# Allegro board OSC_NOU.brd
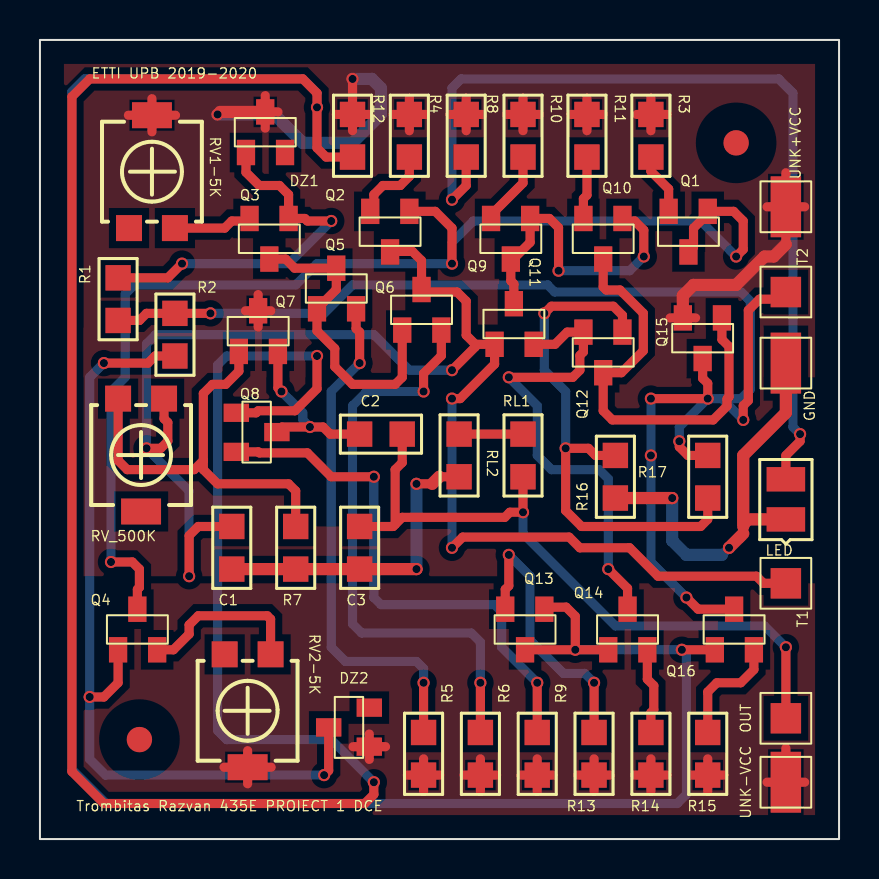
[diagram p0: board, top side]
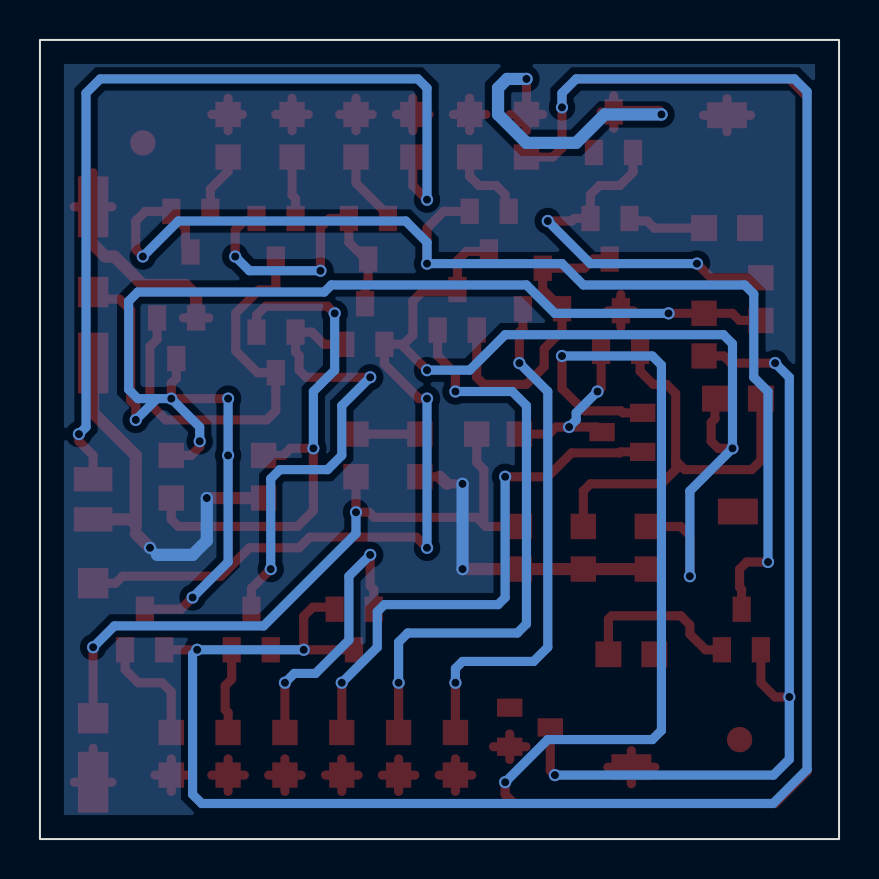
[diagram p1: board, bottom side, seen from below]

Outline 40 x 40 mm; copper layers: TOP, BOTTOM. Coordinates in mm from the lower left corner of the outline.
Outline path: rectangle 0,0 40,40

## Placement (name value [footprint] x y rotation side)
C1  10n  [SMC0805]  9.6 13.51 90 top
C2  1u  [SMC0805]  18.14 20.27 180 top
C3  2.2n  [SMC0805]  16 15.65 270 top
DZ1  BZX84-C2V7  [TO236]  10.31 34.49 270 top
DZ2  BZX84-C2V7  [TO236]  16.36 4.62 0 top
GND  CON1  [JUMPER1]  37.34 23.83 0 top
LED  BZX84-C10  [SMD0805]  37.34 16 90 top
NOREF  -  []  0 43.18 0 top
NOREF#2  -  [unnamed#2]  4.98 4.98 0 top
NOREF#3  -  []  -7.62 0 90 top
NOREF#4  -  [unnamed#2]  34.85 34.85 0 top
OUT  CON1  [JUMPER1#2]  37.34 6.05 0 top
Q1  QBC807-25  [TO236]  33.43 31.29 90 top
Q2  QBC807-25  [TO236]  18.49 31.29 90 top
Q3  QBC807-25  [TO236]  12.45 30.94 90 top
Q4  QBC817-25  [TO236]  3.91 9.6 270 top
Q5  QBC817-25  [TO236]  13.87 26.67 270 top
Q6  QBC817-25  [TO236]  18.14 25.6 270 top
Q7  QBC817-25  [TO236]  9.96 24.54 270 top
Q8  QBC817-25  [TO236]  9.96 21.34 180 top
Q9  QBC856B  [TO236]  24.54 30.94 90 top
Q10  QBC856B  [TO236]  29.16 30.94 90 top
Q11  QBC817-25  [TO236]  22.76 24.89 270 top
Q12  QBC817-25  [TO236]  29.16 25.25 90 top
Q13  QBC817-25  [TO236]  25.25 11.38 90 top
Q14  QBC817-25  [TO236]  28.45 9.6 270 top
Q15  QBC856B  [TO236]  34.14 25.96 90 top
Q16  QBC817-25  [TO236]  33.78 9.6 270 top
R1  510k  [SMR0805]  3.91 25.96 90 top
R2  510k  [SMR0805]  6.76 24.18 90 top
R3  51  [SMR0805]  30.58 36.27 270 top
R4  51  [SMR0805]  18.49 36.27 270 top
R5  51  [SMR0805]  19.2 5.33 270 top
R6  51  [SMR0805]  22.05 5.33 270 top
R7  47k  [SMR0805]  12.8 13.51 90 top
R8  1.5k  [SMR0805]  21.34 36.27 270 top
R9  51  [SMR0805]  24.89 5.33 270 top
R10  51  [SMR0805]  24.18 36.27 270 top
R11  51  [SMR0805]  27.38 36.27 270 top
R12  47k  [SMR0805]  15.65 36.27 270 top
R13  51  [SMR0805]  27.74 5.33 270 top
R14  51  [SMR0805]  30.58 5.33 270 top
R15  51  [SMR0805]  33.43 5.33 270 top
R16  100k  [SMR0805]  28.8 19.2 270 top
R17  10k  [SMR0805]  33.43 17.07 90 top
RL1  1k  [SMR0805]  24.18 18.14 90 top
RL2  22k  [SMR0805]  20.98 20.27 270 top
RV1-5K  30  [TS53YL]  6.76 30.58 270 top
RV2-5K  20  [TS53YL]  9.25 9.25 90 top
RV_500K  1k  [TS53YL]  3.91 22.05 90 top
T1  CON1  [JUMPER1#2]  37.34 12.8 0 top
T2  CON1  [JUMPER1#2]  37.34 27.38 0 top
UNK+VCC  CON1  [JUMPER1]  37.34 31.65 0 top
UNK-VCC  CON1  [JUMPER1]  37.34 2.84 0 top

## Library data of the parts
C1-C3 = C
DZ1 DZ2 = BZX84-C2V7_0
GND OUT T1 T2 UNK+VCC UNK-VCC = CON1
LED = BZX84-C10_3
Q1-Q3 = QBC807-25_1
Q4-Q8 Q11-Q14 Q16 = QBC817-25_0
Q9 Q10 Q15 = QBC856B_0
R1-R17 RL1 RL2 = R
RV1-5K RV2-5K RV_500K = R_var_0

## Footprints (pads in the part's own frame, mm; a bottom-side part is the same pattern mirrored in y, then rotated)
JUMPER1
  rect 1.524x3.048 smd: 1(0,0)
JUMPER1#2
  rect 1.524x1.524 smd: 1(0,0)
SMC0805
  rect 1.27x1.27 smd: 1(0,0) 2(2.134,0)
SMD0805
  rect 1.219x1.93 smd: A(2.007,0) C(0,0)
SMR0805
  rect 1.27x1.27 smd: 1(0,0) 2(2.134,0)
TO236
  rect 1.27x0.914 smd: 1(0.127,0) 2(0.127,1.956) 3(-1.905,0.965)
TS53YL
  rect 1.3x1.3 smd: 1(0,0) 3(0,-2.3)
  rect 1.3x2 smd: 2(-5.65,-1.15)
unnamed#2
  round 1.27 smd: (0,0)

## Nets
+VCC: DZ1.3(C) Q7.3(C) Q15.2(E) R3.1 R4.1 R8.1 R10.1 R11.1 R12.1 RV1-5K.2(N/A) UNK+VCC.1
-VCC: DZ2.1(A) R5.2 R6.2 R9.2 R13.2 R14.2 R15.2 RV2-5K.2(N/A) UNK-VCC.1
0: C1.1 C3.2 GND.1 LED.C R7.1 R16.2 RL2.2
N160502: Q15.3(C) Q16.3(C) R1.1 R2.2 R17.2 T2.1
N179198: Q8.1(B) Q13.1(B) Q13.3(C) Q14.1(B) Q16.1(B) R12.2
N179276: C2.2 Q7.2(E) Q8.3(C)
N179450: Q3.2(E) RV1-5K.1
N179460: DZ1.1(A) Q3.1(B) R1.2
N179466: DZ2.3(C) Q4.1(B) R2.1
N179492: C1.2 Q2.3(C) Q6.3(C) Q11.1(B) RV_500K.3 T1.1
N179570: Q13.2(E) R13.1
N179600: Q9.1(B) Q9.3(C) Q10.1(B) Q11.3(C)
N179624: Q10.3(C) Q12.3(C) Q15.1(B)
N179628: Q11.2(E) Q12.2(E) Q14.3(C)
N179650: Q16.2(E) R15.1
N179930: Q12.1(B) R16.1 R17.1
N179996: Q1.1(B) Q1.3(C) Q2.1(B) Q4.3(C)
N180070: Q5.2(E) R5.1
N180104: Q6.2(E) R6.1
N180116: Q3.3(C) Q5.1(B) Q5.3(C) Q6.1(B)
N180342: Q4.2(E) RV2-5K.3
N180398: Q7.1(B) R7.2 RV_500K.1
N180514: Q8.2(E) R9.1
N180774: Q9.2(E) R10.2
N180802: Q10.2(E) R11.2
N180840: Q14.2(E) R14.1
N180976: Q2.2(E) R4.2
N181004: Q1.2(E) R3.2
N181010: C2.1 C3.1 OUT.1 RL1.1
N1792300: LED.A R8.2
N1801541: RL1.2 RL2.1

Pads without a net: DZ1 2; DZ2 2; RV1-5K 3; RV2-5K 1; RV_500K 2

## Via types
v1: diameter 0.61, hole 0.406, TOP to BOTTOM, 51 vias

## Routing (per net, layer and track width the routed paths; a pad name or vN(x,y) marks a point on that pad's centre or on a via; arc(x,y) is an arc through that point)
+VCC: length 58.2
  TOP w0.457: 37.34,29.77 UNK+VCC.1 ; UNK+VCC.1 36.4,31.65 ; UNK+VCC.1 38.28,31.65 ; UNK+VCC.1 37.34,33.35 ; R3.1 31.39,36.27 ; R3.1 30.58,35.46 ; R3.1 30.58,37.08 ; R3.1 29.87,36.27 ; 20.52,36.27 R8.1 ; R8.1 21.34,37.08 ; R8.1 22.15,36.27 ; R8.1 21.34,35.46 ; R4.1 19.3,36.27 ; R4.1 18.49,35.46 ; R4.1 18.49,37.08 ; R4.1 17.68,36.27 ; RV1-5K.2 6.78,36.23 ; RV1-5K.2 4.43,36.23 ; RV1-5K.2 5.61,37.06 ; RV1-5K.2 5.61,35.4 ; 10.29,26.44 Q7.3 ; Q7.3 10.92,25.63 ; Q7.3 10.92,27.25 ; Q7.3 11.56,26.44 ; 15.65,35.46 R12.1 ; R12.1 14.83,36.27 ; R12.1 v1(15.65,38.05) ; R12.1 16.46,36.27 ; R11.1 28.19,36.27 ; R11.1 27.38,35.46 ; R11.1 26.57,36.27 ; R11.1 27.38,37.08 ; DZ1.3 11.91,36.4 ; DZ1.3 11.28,37.21 ; DZ1.3 11.28,35.58 ; R10.1 24.99,36.27 ; R10.1 24.18,35.46 ; R10.1 23.37,36.27 ; R10.1 24.18,37.08 ; 32.82,26.09 Q15.2 31.55,26.09
  TOP w0.61: 37.34,29.77 36.73,29.16 36.27,29.16 34.85,27.74 32.72,27.74 32.18,27.2 Q15.2 ; 9.02,36.4 DZ1.3
  BOTTOM w0.61: v1(8.89,36.27) 11.73,36.27 13.16,34.85 15.65,34.85 17.07,36.27 17.07,37.59 16.61,38.05 v1(15.65,38.05)
-VCC: length 30
  TOP w0.457: R15.2 33.43,4.01 ; R15.2 34.24,3.2 ; R15.2 32.61,3.2 ; R15.2 33.43,2.39 ; R9.2 25.71,3.2 ; R9.2 24.08,3.2 ; R9.2 24.89,4.01 ; R9.2 24.89,2.39 ; 29.77,3.2 R14.2 ; R14.2 31.39,3.2 ; R14.2 30.58,2.39 ; R14.2 30.58,4.01 ; 26.92,3.2 R13.2 ; R13.2 28.55,3.2 ; R13.2 27.74,2.39 ; R13.2 27.74,4.01 ; 18.39,3.2 R5.2 ; R5.2 19.2,2.39 ; R5.2 20.02,3.2 ; R5.2 19.2,4.01 ; R6.2 22.05,4.01 ; R6.2 22.05,2.39 ; R6.2 22.86,3.2 ; R6.2 21.23,3.2 ; UNK-VCC.1 38.28,2.84 ; UNK-VCC.1 36.4,2.84 ; UNK-VCC.1 37.34,4.55 ; 15.67,4.62 DZ2.1 ; DZ2.1 16.48,3.99 ; DZ2.1 16.48,5.26 ; DZ2.1 17.3,4.62 ; 9.22,3.6 RV2-5K.2 ; RV2-5K.2 10.4,2.77 ; RV2-5K.2 10.4,4.42 ; RV2-5K.2 11.57,3.6
0: length 36.8
  TOP w0.457: RL2.2 19.99,18.14 ; 35.2,15.29 35.2,15.65 35.56,16 ; 19.63,17.78 v1(18.85,17.78)
  TOP w0.61: v1(34.49,14.58) 35.2,15.29 ; GND.1 37.34,21.34 35.2,19.2 35.2,15.65 ; LED.C 35.56,16 ; R16.2 v1(31.65,17.07) ; C1.1 R7.1 C3.2 v1(18.85,13.51) ; 19.99,18.14 19.63,17.78
  BOTTOM w0.457: 34.14,14.22 v1(34.49,14.58)
  BOTTOM w0.61: v1(18.85,13.51) v1(18.85,17.78) ; v1(31.65,17.07) 31.65,14.94 32.36,14.22 34.14,14.22
N160502: length 71.7
  TOP w0.457: R1.1 4.98,25.96 5.33,26.31 R2.2 v1(8.53,26.31) ; Q16.3 32.94,11.51 v1(32.36,12.09) ; v1(32,19.91) 32,19.63 32.44,19.2 R17.2 ; v1(30.58,22.05) v1(33.43,22.05) 33.43,22.81 33.17,23.06 Q15.3 ; v1(35.2,20.98) 35.2,21.69 35.46,21.95 35.46,26.47 36.02,27.03 36.98,27.03 T2.1
  BOTTOM w0.457: 34.14,22.05 35.1,22.05 35.56,22.5 35.56,26.92 35.1,27.38 25.77,27.38 25.41,27.74 15.65,27.74 14.22,26.31 v1(8.53,26.31) ; 34.14,22.05 v1(35.2,20.98) ; 34.14,22.05 v1(33.43,22.05) 32,20.62 v1(32,19.91) ; v1(32.36,12.09) 30.58,13.87 v1(30.58,19.2) v1(30.58,22.05)
N179198: length 207.6
  TOP w0.457: v1(26.8,9.47) Q14.1 ; v1(26.8,9.47) Q13.3 ; v1(26.8,9.47) 26.8,11.15 26.34,11.61 25.35,11.61 Q13.1 ; v1(16.71,2.84) 16.71,2.24 16.26,1.78 3.2,1.78 1.6,3.38 1.6,37.16 2.49,38.05 13.16,38.05 13.87,37.34 v1(13.87,36.63) 13.87,34.59 14.33,34.14 R12.2 ; Q8.1 10.82,21.34 10.92,21.44 12.76,21.44 13.87,22.54 v1(13.87,24.18) ; Q16.1 v1(32.13,9.47)
  BOTTOM w0.457: v1(13.87,24.18) 9.35,24.18 8.89,23.72 8.89,5.44 9.35,4.98 14.58,4.98 v1(16.71,2.84) ; v1(13.87,36.63) 13.87,37.34 13.16,38.05 2.24,38.05 1.6,37.41 1.6,3.48 3.3,1.78 31.9,1.78 32.36,2.24 32.36,9.25 v1(32.13,9.47) v1(26.8,9.47)
N179276: length 9.1
  TOP w0.457: 12.04,20.19 Q8.3 12.12,20.62 v1(13.51,20.62) 14.17,20.62 14.53,20.27 C2.2 ; v1(12.09,22.4) 11.91,22.58 Q7.2
  BOTTOM w0.457: v1(13.51,20.62) 13.16,20.98 13.16,21.34 v1(12.09,22.4)
N179450: length 3.9
  TOP w0.457: Q3.2 10.36,30.94 9.6,30.94 9.25,30.58 RV1-5K.1
N179460: length 18.8
  TOP w0.457: DZ1.1 10.31,33.38 10.97,32.72 11.99,32.72 12.45,32.26 Q3.1 13.26,31.06 13.39,30.94 v1(14.58,30.94) ; v1(7.11,28.8) 6.4,28.09 R1.2
  BOTTOM w0.457: v1(14.58,30.94) 12.45,28.8 v1(7.11,28.8)
N179466: length 41.7
  TOP w0.457: v1(2.49,7.11) 3.2,7.11 3.91,7.82 Q4.1 ; DZ2.3 14.45,3.43 v1(14.22,3.2) ; v1(3.2,23.83) 5.41,23.83 5.77,24.18 R2.1
  BOTTOM w0.457: v1(3.2,23.83) 2.49,23.11 v1(2.49,7.11) 2.49,3.99 3.28,3.2 v1(14.22,3.2)
N179492: length 76.5
  TOP w0.457: C1.2 7.92,15.65 7.47,15.19 v1(7.47,13.16) ; 21.79,24.77 Q11.1 22.76,23.77 21.03,22.05 v1(20.62,22.05) ; 21.79,24.77 21.34,25.22 21.34,26.92 20.88,27.38 19.23,27.38 Q6.3 19.1,28.96 18.64,29.41 17.55,29.41 Q2.3 ; 21.79,24.77 21.79,24.64 v1(20.62,23.47) ; v1(20.62,14.58) 21.16,15.11 26.49,15.11 27.03,14.58 29.51,14.58 30.94,13.16 35.86,13.16 36.22,12.8 T1.1 ; RV_500K.3 6.21,21.04 6.4,20.85 6.4,19.91 6.05,19.56 v1(5.33,19.56)
  BOTTOM w0.457: v1(20.62,22.05) v1(20.62,14.58) ; v1(7.47,13.16) 7.47,17.42 v1(5.33,19.56) 5.33,24.79 5.79,25.25 16.71,25.25 18.49,23.47 v1(20.62,23.47)
N179570: length 14.1
  TOP w0.457: v1(27.74,7.82) R13.1 ; v1(23.47,14.22) 23.47,12.67 23.29,12.5 Q13.2
  BOTTOM w0.457: v1(27.74,7.82) 27.27,8.29 26.2,8.29 24.54,9.96 24.54,13.16 v1(23.47,14.22)
N179600: length 15.8
  TOP w0.457: Q10.1 29.29,30.94 29.77,30.94 30.23,30.48 v1(30.23,29.16) ; Q11.3 23.72,27.79 23.57,27.94 Q9.3 23.7,29.03 24.54,29.87 Q9.1 25.5,31.06 25.96,30.61 v1(25.96,28.45)
  BOTTOM w0.457: v1(25.96,28.45) 29.51,28.45 v1(30.23,29.16)
N179624: length 21.5
  TOP w0.457: Q10.3 28.19,27.64 28.35,27.48 29.04,27.48 30.2,26.32 30.2,24.44 29.1,23.34 Q12.3 28.19,21.44 28.65,20.98 33.7,20.98 34.39,21.67 34.39,22.03 34.49,22.13 34.49,24.65 34.14,25.01 Q15.1
N179628: length 23.9
  TOP w0.457: v1(28.45,13.51) 29.41,12.55 Q14.3 ; Q11.2 25.78,24.77 26.39,25.37 Q12.2 27.2,24.38 27.03,24.21 27.03,23.47 26.67,23.11 v1(23.47,23.11)
  BOTTOM w0.457: v1(23.47,23.11) 24.89,21.69 24.89,19.2 25.6,18.49 27.99,18.49 28.45,18.03 v1(28.45,13.51)
N179650: length 5.8
  TOP w0.457: Q16.2 35.74,8.48 35.08,7.82 33.88,7.82 33.43,7.37 R15.1
N179930: length 26.7
  TOP w0.457: R17.1 33.43,16 33.07,15.65 27.11,15.65 26.31,16.44 v1(26.31,19.56) 27.46,19.56 27.81,19.2 R16.1 ; v1(25.25,26.31) 25.6,26.67 28.7,26.67 29.16,26.21 Q12.1
  BOTTOM w0.457: v1(26.31,19.56) 26.31,22.4 25.25,23.47 v1(25.25,26.31)
N179996: length 61.4
  TOP w0.457: Q4.3 4.88,12.5 4.98,12.6 4.98,13.51 4.62,13.87 v1(3.56,13.87) ; Q2.1 19.79,31.42 20.62,30.58 v1(20.62,28.8) ; Q1.3 32.72,29.64 32.72,30.58 33.43,31.29 Q1.1 34.72,31.42 35.2,30.94 35.2,29.51 v1(34.85,29.16)
  BOTTOM w0.457: v1(34.85,29.16) 33.07,30.94 21.69,30.94 20.62,29.87 v1(20.62,28.8) 13.87,28.8 12.8,27.74 4.72,27.74 4.27,27.28 4.27,23.11 3.56,22.4 v1(3.56,13.87)
N180070: length 25.9
  TOP w0.457: v1(19.2,7.82) R5.1 ; v1(16,23.83) 16,25.37 15.82,25.55 Q5.2
  BOTTOM w0.457: v1(16,23.83) 14.58,22.4 14.58,9.6 15.29,8.89 18.85,8.89 19.2,8.53 v1(19.2,7.82)
N180104: length 29.5
  TOP w0.457: v1(19.2,22.4) 19.2,23.3 20.09,24.19 Q6.2 ; v1(22.05,7.82) R6.1
  BOTTOM w0.457: v1(19.2,22.4) 16.36,22.4 15.65,21.69 15.65,10.77 16.1,10.31 21.59,10.31 22.05,9.86 v1(22.05,7.82)
N180116: length 15.5
  TOP w0.457: Q3.3 12.29,29.03 12.75,28.57 Q5.3 14.83,27.51 Q5.1 13.87,25.44 14.76,24.55 14.76,23.65 15.65,22.76 17.78,22.76 18.14,23.11 Q6.1
N180342: length 8.5
  TOP w0.457: Q4.2 6.68,9.47 7.47,10.26 7.47,10.72 7.92,11.18 11.38,11.18 11.55,11.01 RV2-5K.3
N180398: length 21.6
  TOP w0.457: Q7.1 9.96,23.42 9.3,22.76 8.64,22.76 8.18,22.3 8.18,18.95 ; 8.18,18.95 7.72,18.49 4.37,18.49 3.91,18.95 RV_500K.1 ; 8.18,18.95 8.18,18.49 8.89,17.78 12.45,17.78 12.8,17.42 R7.2
N180514: length 26.9
  TOP w0.457: v1(24.89,7.82) R9.1 ; Q8.2 10.93,19.38 10.98,19.33 13.39,19.33 14.58,18.14 v1(16.71,18.14)
  BOTTOM w0.457: v1(16.71,18.14) 16.71,12.09 17.07,11.73 22.76,11.73 23.11,11.38 23.11,9.6 v1(24.89,7.82)
N180774: length 3.7
  TOP w0.457: R10.2 24.18,32.84 22.58,31.24 Q9.2
N180802: length 3.1
  TOP w0.457: R11.2 27.38,32.23 27.2,32.05 Q10.2
N180840: length 4.3
  TOP w0.457: Q14.2 30.4,8 30.73,7.68 30.73,6.47 30.58,6.32 R14.1
N180976: length 4.2
  TOP w0.457: 16.54,31.6 Q2.2 16.71,31.6 16.71,32.26 17.17,32.72 18.03,32.72 18.49,33.17 R4.2
N181004: length 3.1
  TOP w0.457: Q1.2 31.47,32.54 30.58,33.43 R3.2
N181010: length 35.1
  TOP w0.457: C2.1 18.14,18.85 17.78,18.49 17.78,15.75 ; v1(37.34,9.6) OUT.1 ; C3.1 17.68,15.65 17.78,15.75 ; RL1.1 v1(24.18,16.36) 23.52,16.36 23.27,16.1 18.14,16.1 17.78,15.75
  BOTTOM w0.457: v1(24.18,16.36) 24.18,15.29 28.8,10.67 36.27,10.67 v1(37.34,9.6)
N1792300: length 45.3
  TOP w0.457: v1(20.62,32) 21.34,32.72 R8.2 ; v1(38.05,20.27) 38.05,19.91 37.34,19.2 LED.A
  BOTTOM w0.457: v1(38.05,20.27) 37.69,20.62 37.69,37.34 36.98,38.05 21.08,38.05 20.62,37.59 v1(20.62,32)
N1801541: length 3.2
  TOP w0.457: RL2.1 RL1.2

## Copper pours and planes (outline as drawn; the poured copper is in the pictures)
+VCC on TOP: 1.2,23.11 1.2,38.8 38.8,38.8 38.8,23.11 ; 10 cut-outs
+VCC on TOP: 1.2,13.16 1.2,25.6 38.8,25.6 38.8,13.16 ; 9 cut-outs
-VCC on TOP: 1.2,1.2 1.2,14.22 38.8,14.22 38.8,1.2 ; 7 cut-outs
0 on BOTTOM: 1.2,1.2 1.2,38.8 38.8,38.8 38.8,1.2 ; 6 cut-outs

## Text on the board
Ref Des/Silkscreen Top: Trombitas Razvan 435E PROIECT 1 DCE | ETTI UPB 2019-2020
XSECTION_CHART: *  SURFACE - AIR 0 MIL | L1: TOP CONDUCTOR - COPPER 0.71 MIL | *  DIELECTRIC - FR-4 37.95 MIL | L2: BOTTOM CONDUCTOR - COPPER 0.71 MIL | FIGURE | DESIGN CROSS SECTION CHART | ___________________________ | TOTAL THICKNESS 39.37 MIL | SIZE | 13.0 | DRILL CHART: TOP to BOTTOM | ALL UNITS ARE IN MILS | PLATED | QTY | 60 | 1-2
